# EAGLE board Circuito elétrico (EAGLE 9.7.0)

Size 188.05 x 126.27 mm. Coordinates in mm from the lower left corner, seen from the top.
Outline: 0,0 188.05,0 188.05,126.27 0,126.27 0,0
Copper layers (1*16): Top 0.035mm / dielectric 1.5mm / Bottom 0.035mm
Design rules "default": minimum track width 6mil, minimum drill 0.35mm, track to track 6mil, track to pad 6mil, pad to pad 6mil, via to via 6mil, smd to smd 6mil, copper to edge 40mil, drill to drill 6mil, minimum pad ring 10mil, minimum via ring 8mil, stop-mask expansion 4mil, vias tented up to drill 0mil, thermal gap 10mil

## Footprints (pad centres in the part's own frame; a part is rotated, then mirrored left to right if it is on the bottom)
LEDRD254W60D565H860B = drill 0.981 pad 1.581: 1 -1.27,0; 2 1.27,0
LEDRD254W60D565H860B_G = drill 0.981 pad 1.581: 1 -1.27,0; 2 1.27,0
RESAD1016W63L850D250B = drill 0.83 pad 1.43: 1 -5.08,0; 2 5.08,0
HA-06-SM065 = drill 1 pad 1.676: 1 -2.54,-2.54; 2 0,2.54; 3 2.54,-2.54
SWITCH-MOMENTARY-PTH-6.5MM = drill 1.016 pad 1.88: 1 -3.251,2.261; 2 3.251,2.261; 3 -3.251,-2.261; 4 3.251,-2.261
ARDUINO-UNO-R3-SHIELD = drill 1.016 pad 1.88: 3.3V 24.13,-2.54; 5V 24.13,0; A0 24.13,12.7; A1 24.13,15.24; A2 24.13,17.78; A3 24.13,20.32; A4 24.13,22.86; A5 24.13,25.4; AREF -24.13,-13.97; D2 -24.13,20.32; D3 -24.13,17.78; D4 -24.13,15.24; D5 -24.13,12.7; D6 -24.13,10.16; D7 -24.13,7.62; D8 -24.13,3.81; D9 -24.13,1.27; D10 -24.13,-1.27; D11 -24.13,-3.81; D12 -24.13,-6.35; D13 -24.13,-8.89; GND@0 24.13,2.54; GND@1 24.13,5.08; GND@2 -24.13,-11.43; IOREF 24.13,-7.62; NC 24.13,-10.16; RES 24.13,-5.08; RX -24.13,25.4; SCL -24.13,-19.05; SDA -24.13,-16.51; TX -24.13,22.86; VIN 24.13,7.62
JHD-162A = drill 1.016 long: 1 -19.05,0; 2 -16.51,0; 3 -13.97,0; 4 -11.43,0; 5 -8.89,0; 6 -6.35,0; 7 -3.81,0; 8 -1.27,0; 9 1.27,0; 10 3.81,0; 11 6.35,0; 12 8.89,0; 13 11.43,0; 14 13.97,0; 15 16.51,0; 16 19.05,0

## Placement (x,y rotation side)
D1  RED  [LEDRD254W60D565H860B]  20.6,31.73 180 top
D2  GREEN  [LEDRD254W60D565H860B_G]  25.68,31.73 180 top
R1  350  [RESAD1016W63L850D250B]  19.33,16.49 90 top
R2  1k  [RESAD1016W63L850D250B]  49.81,6.33 0 top
R3  1k  [RESAD1016W63L850D250B]  72.67,6.33 0 top
R4  325  [RESAD1016W63L850D250B]  24.41,16.49 90 top
R5  220  [RESAD1016W63L850D250B]  151.61,111.54 270 top
RPOT1  250k  [HA-06-SM065]  110.97,88.68 0 top
S1  SWITCH_MOMENTARY  [SWITCH-MOMENTARY-PTH-6.5MM]  65.05,17.76 90 top
S2  SWITCH_MOMENTARY  [SWITCH-MOMENTARY-PTH-6.5MM]  42.19,17.76 90 top
U2  ARDUINO-UNO-R3-SHIELD  [ARDUINO-UNO-R3-SHIELD]  47.88,96.43 270 top
U3  LCD-16X2JHD-162A  [JHD-162A]  132.42,63.41 0 top

## Library data of the parts
D1 = Tinkercad; CATEGORY: Opto-Electronic; SUB-CATEGORY: LED; VALUE: LED_RED
D2 = Tinkercad; CATEGORY: Opto-Electronic; SUB-CATEGORY: LED; VALUE: LED_GREEN
R1-R5 RPOT1 S1 S2 U2 U3 = Tinkercad

## Nets
D1_C: D1.2 R1.2
D2_C: D2.2 R4.2
U2_5V: R5.1 RPOT1.1 S1.1 S1.2 S2.1 S2.2 U2.5V U3.2
U2_D2: U2.D2 U3.11
U2_D3: U2.D3 U3.12
U2_D4: U2.D4 U3.13
U2_D5: U2.D5 U3.14
U2_D6: R3.1 S1.3 S1.4 U2.D6
U2_D7: R2.1 S2.3 S2.4 U2.D7
U2_D8: D1.1 U2.D8
U2_D9: D2.1 U2.D9
U2_GND: R1.1 R2.2 R3.2 R4.1 RPOT1.3 U2.GND@0 U2.GND@1 U2.GND@2 U3.1 U3.5 U3.16
U2_RX: U2.RX U3.4
U2_TX: U2.TX U3.6
U3_LED+: R5.2 U3.15
U3_VO: RPOT1.2 U3.3

## Tracks (layer width: path | path; a pad name or v marks a point on that pad's centre or on a via)
D1_C  (1 unrouted)
D2_C  (1 unrouted)
U2_5V  (7 unrouted)
U2_D2  (1 unrouted)
U2_D3  (1 unrouted)
U2_D4  (1 unrouted)
U2_D5  (1 unrouted)
U2_D6  (3 unrouted)
U2_D7  (3 unrouted)
U2_D8  (1 unrouted)
U2_D9  (1 unrouted)
U2_GND  (10 unrouted)
U2_RX  (1 unrouted)
U2_TX  (1 unrouted)
U3_LED+  (1 unrouted)
U3_VO  (1 unrouted)